# Altium PCB 2019-07-21_03-32-53.PcbDoc
Units mil, origin at the board's own origin, x right, y up, seen from the top; angles counter-clockwise.
Board outline 2206 x 2006 mil, 4 copper layers (Top Layer, MidLayer1, MidLayer2, Bottom Layer); 11 components, 6 nets, 16 pads, 31 vias.
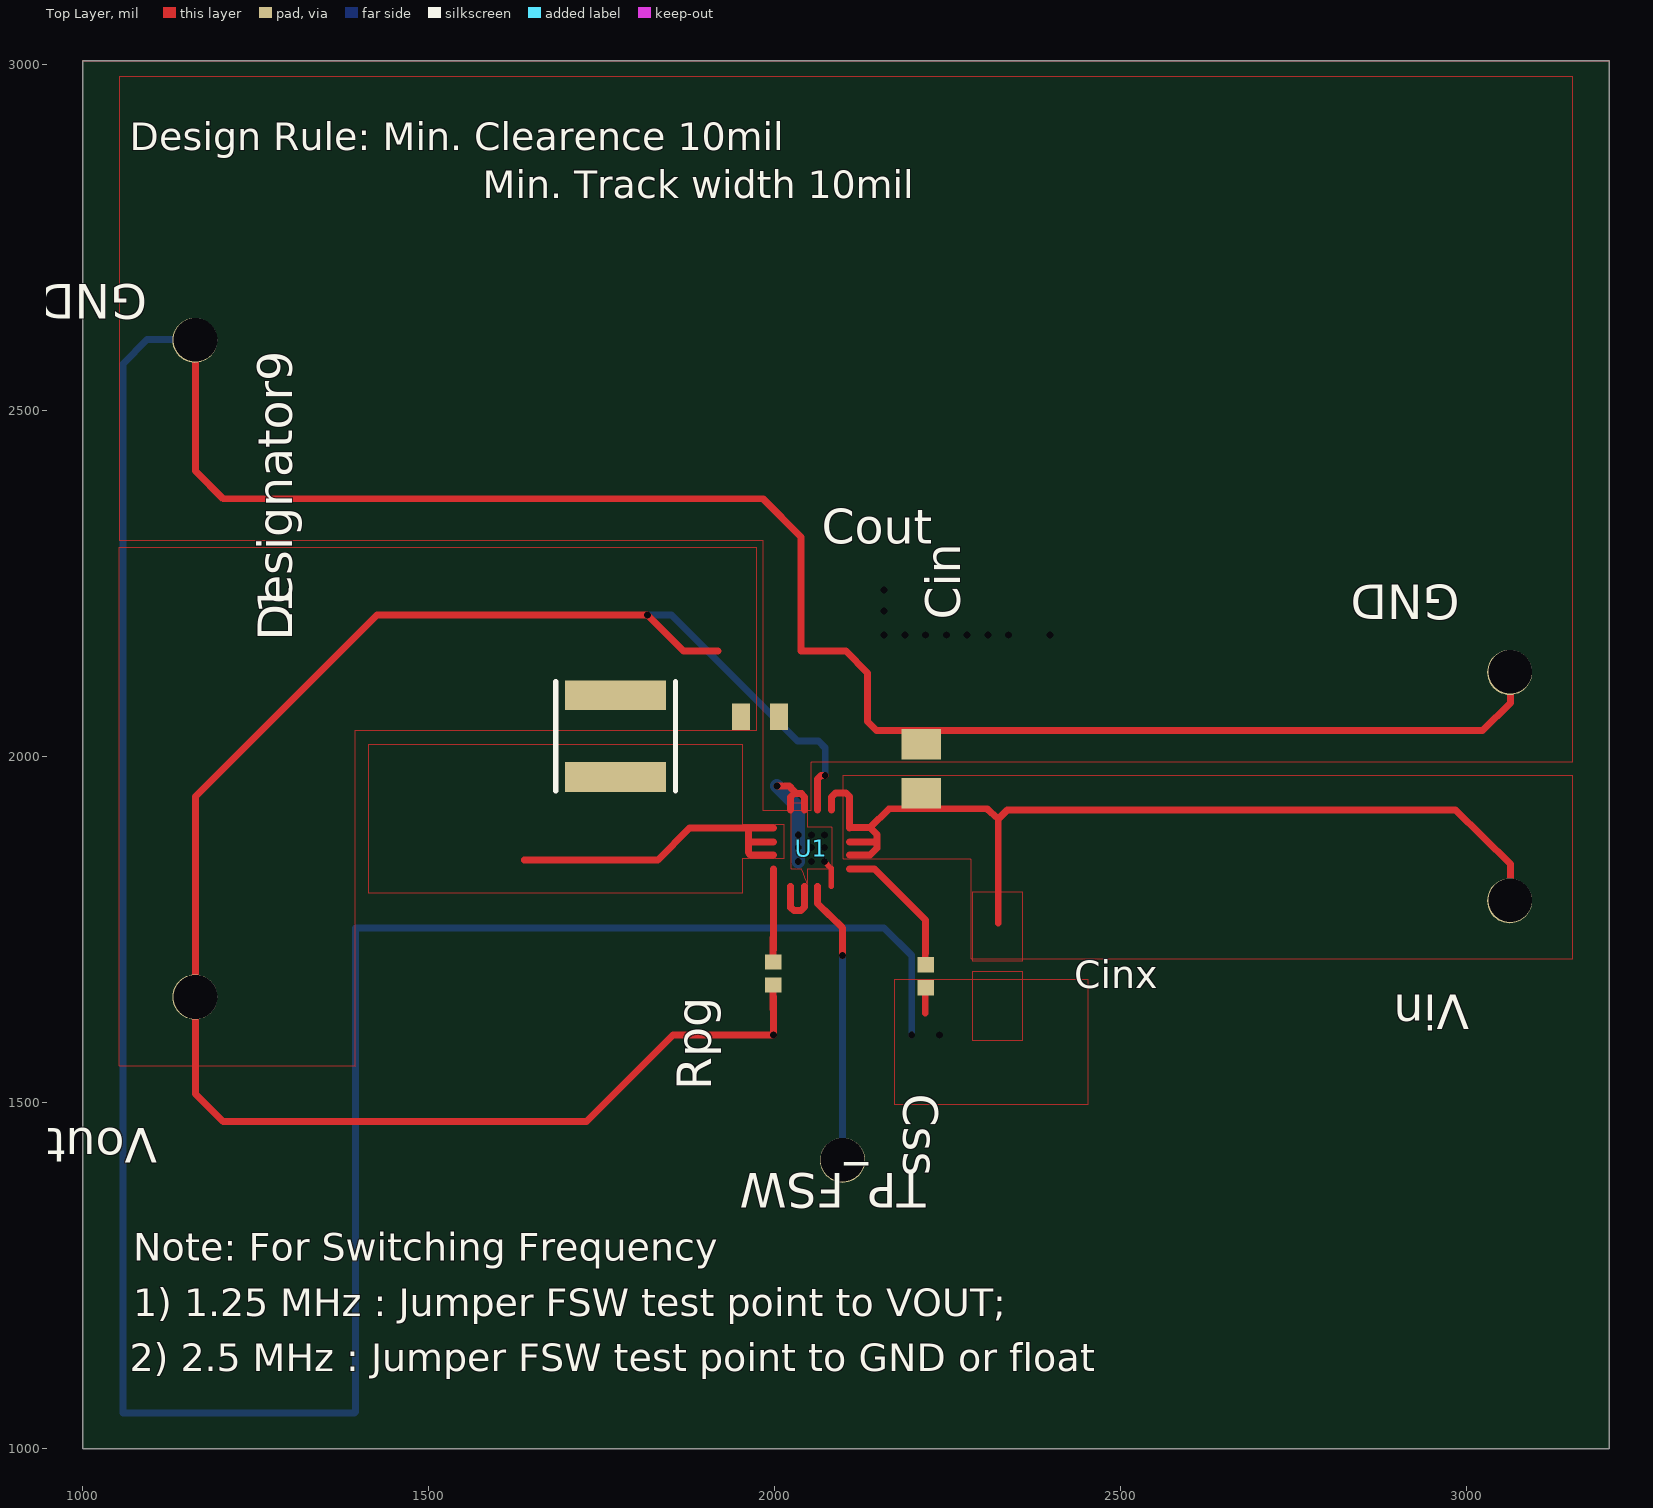
[diagram p0: Top Layer view]
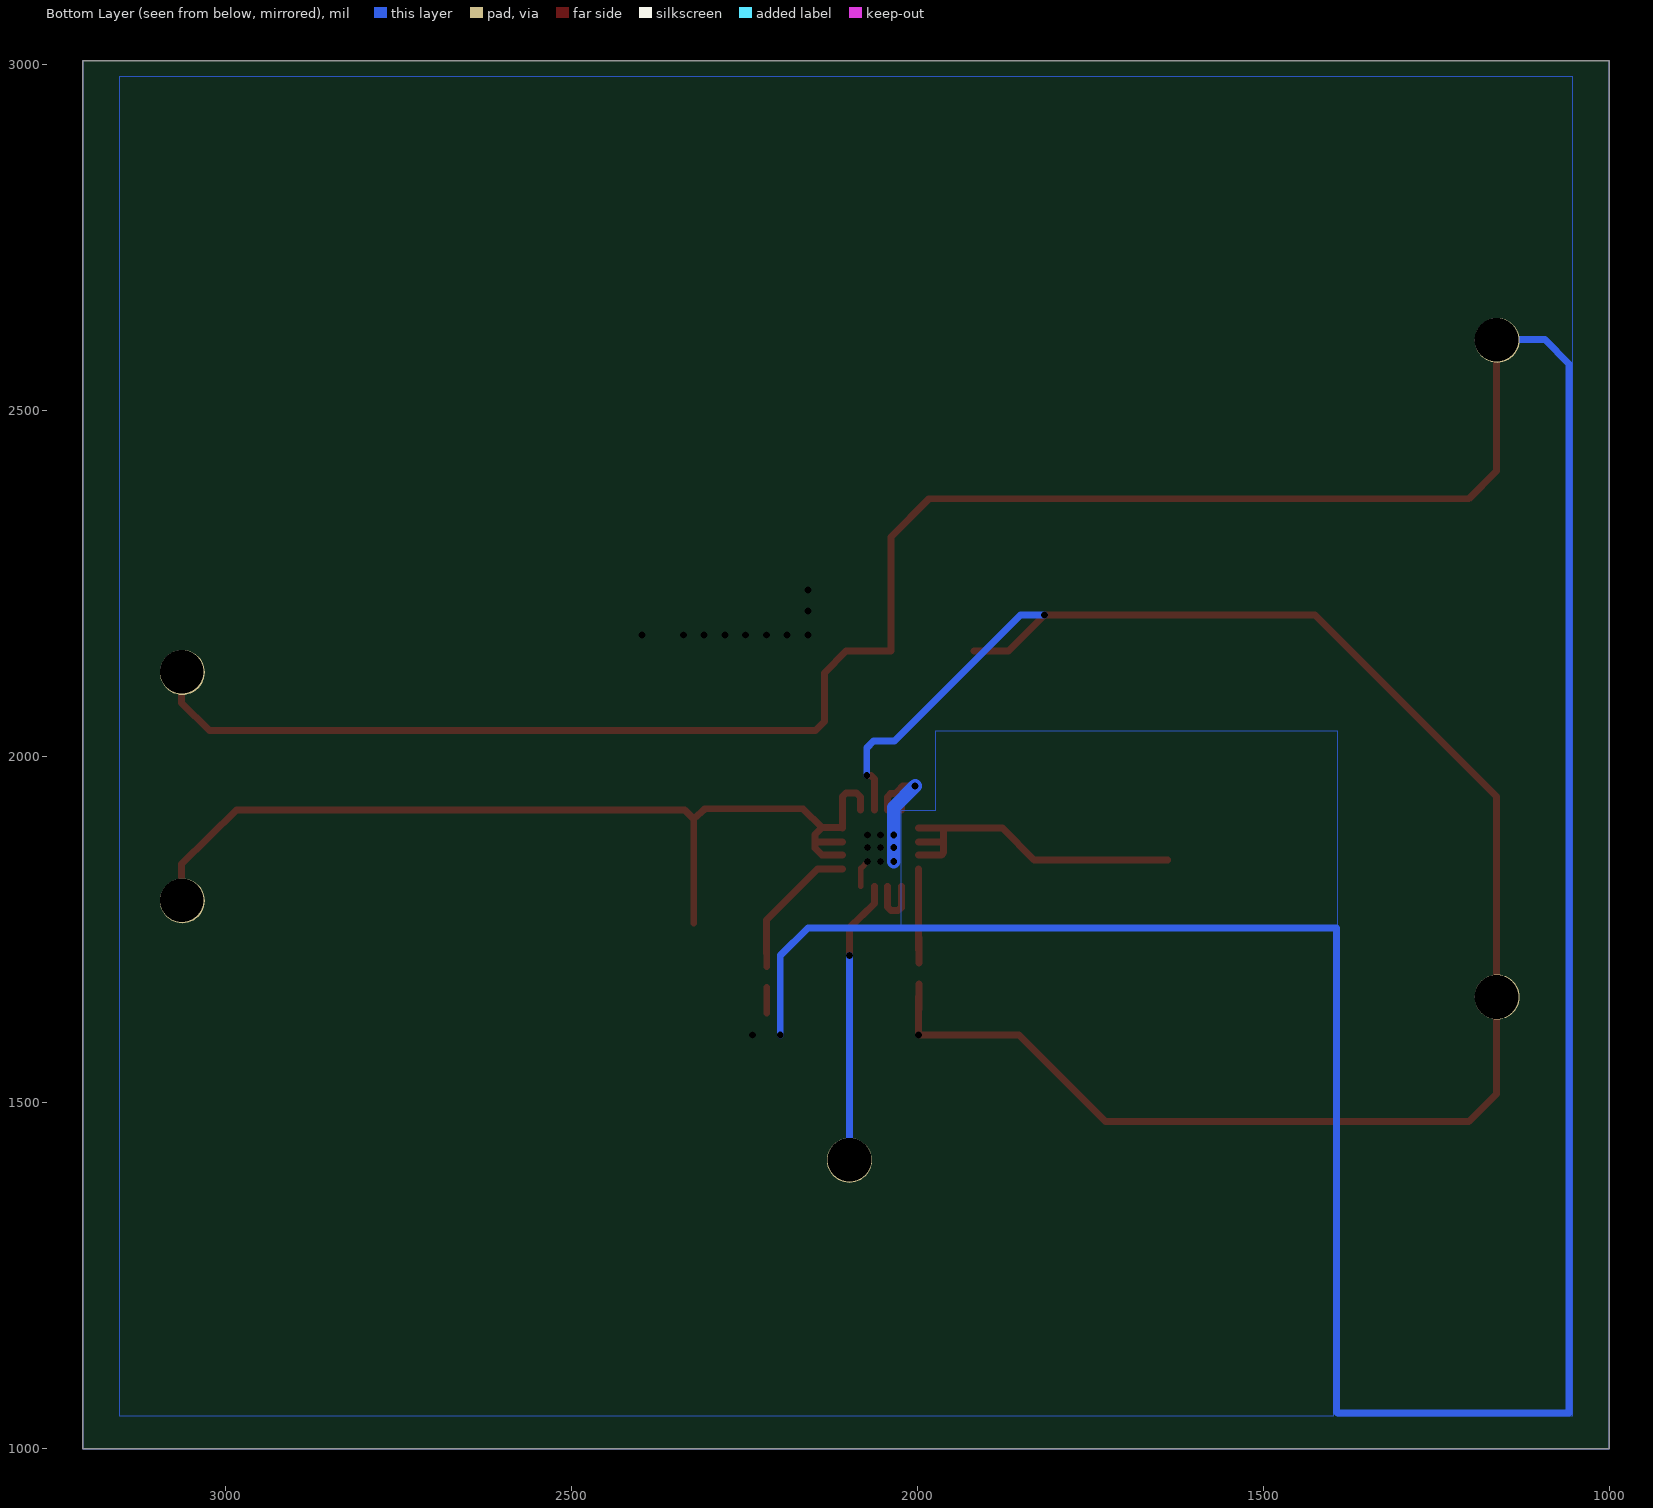
[diagram p1: Bottom Layer view, seen from below]
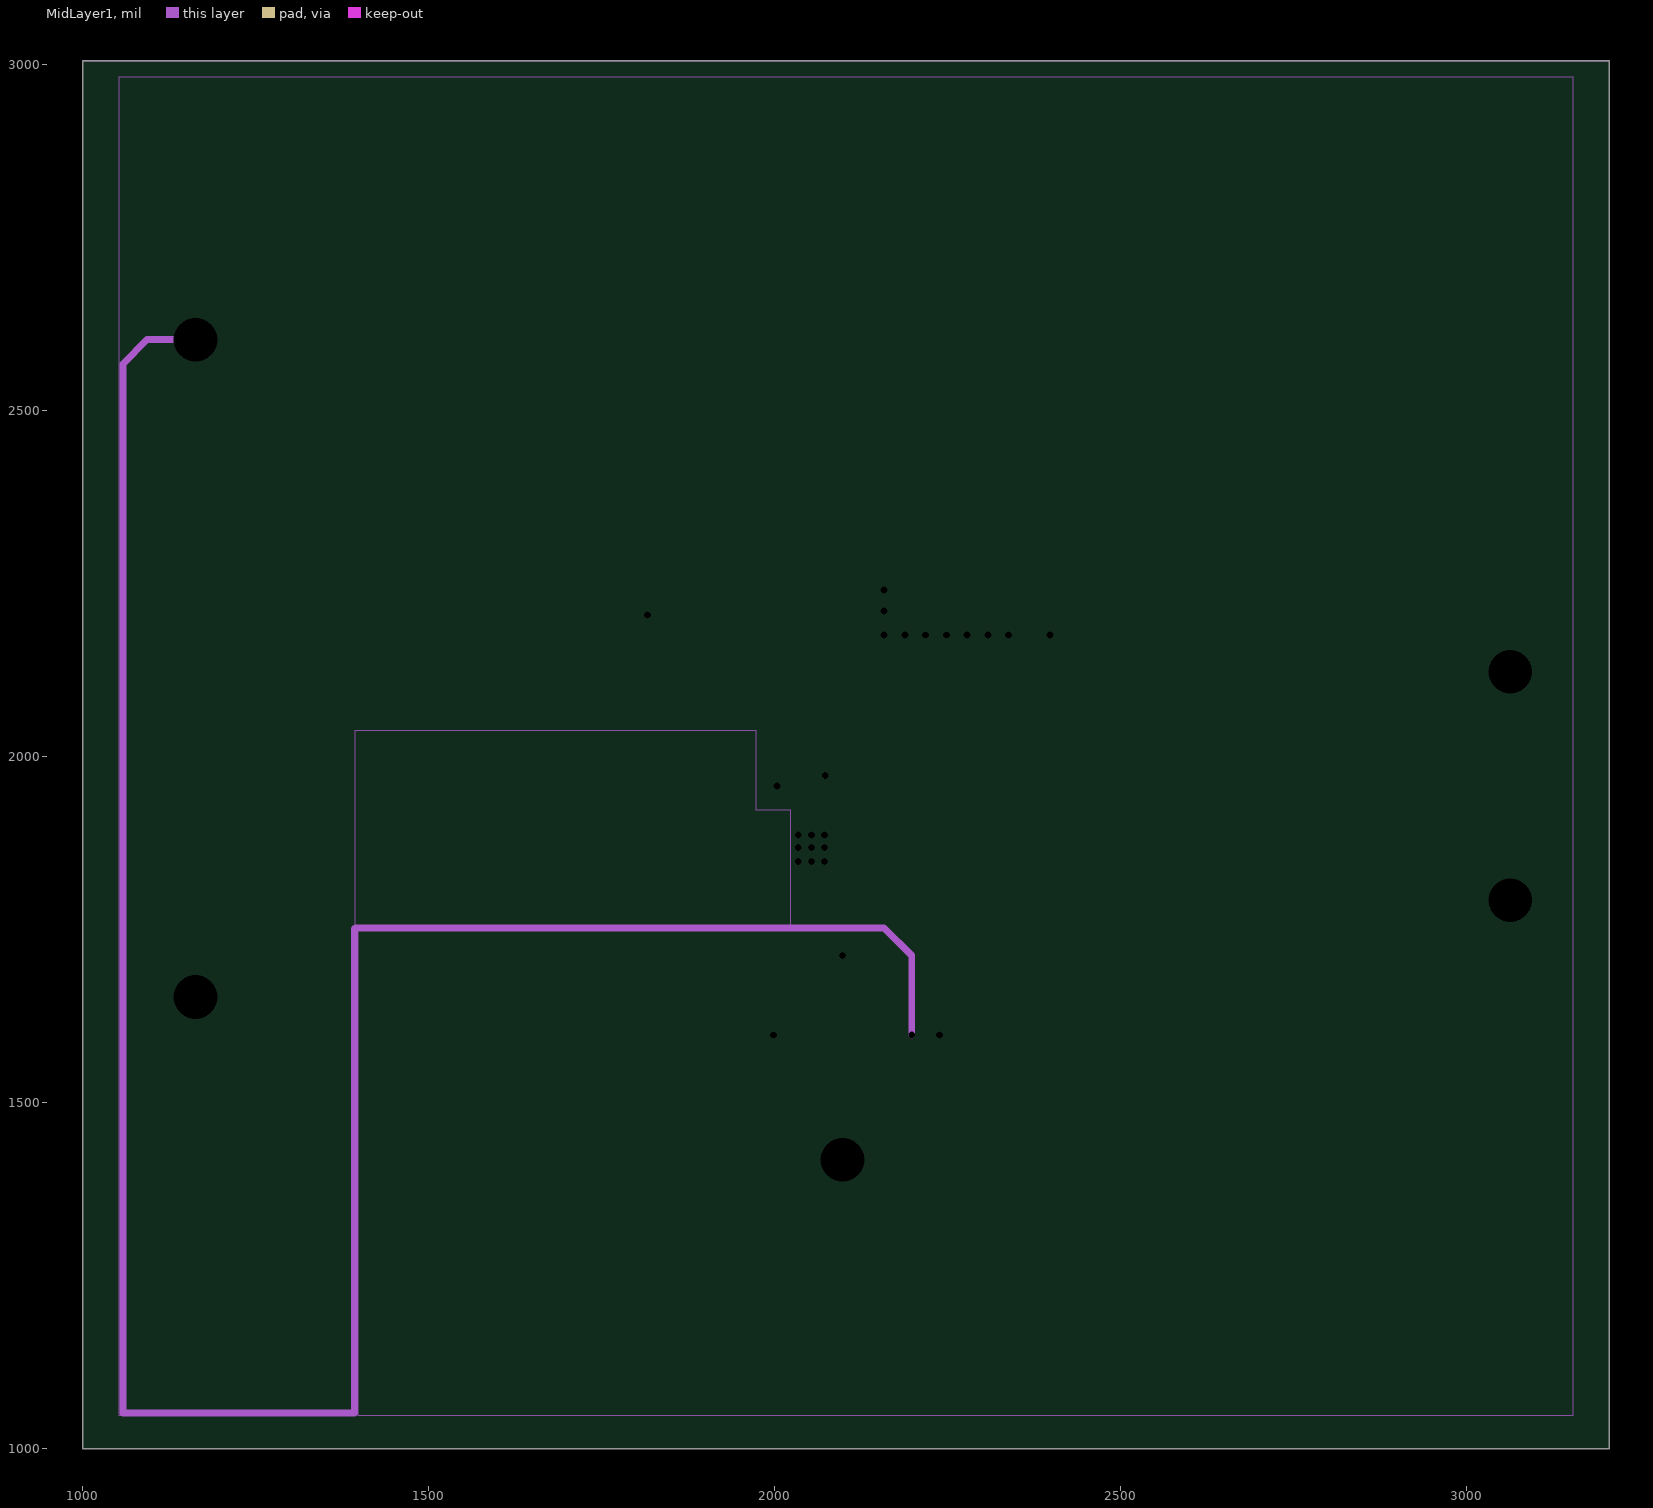
[diagram p2: MidLayer1]
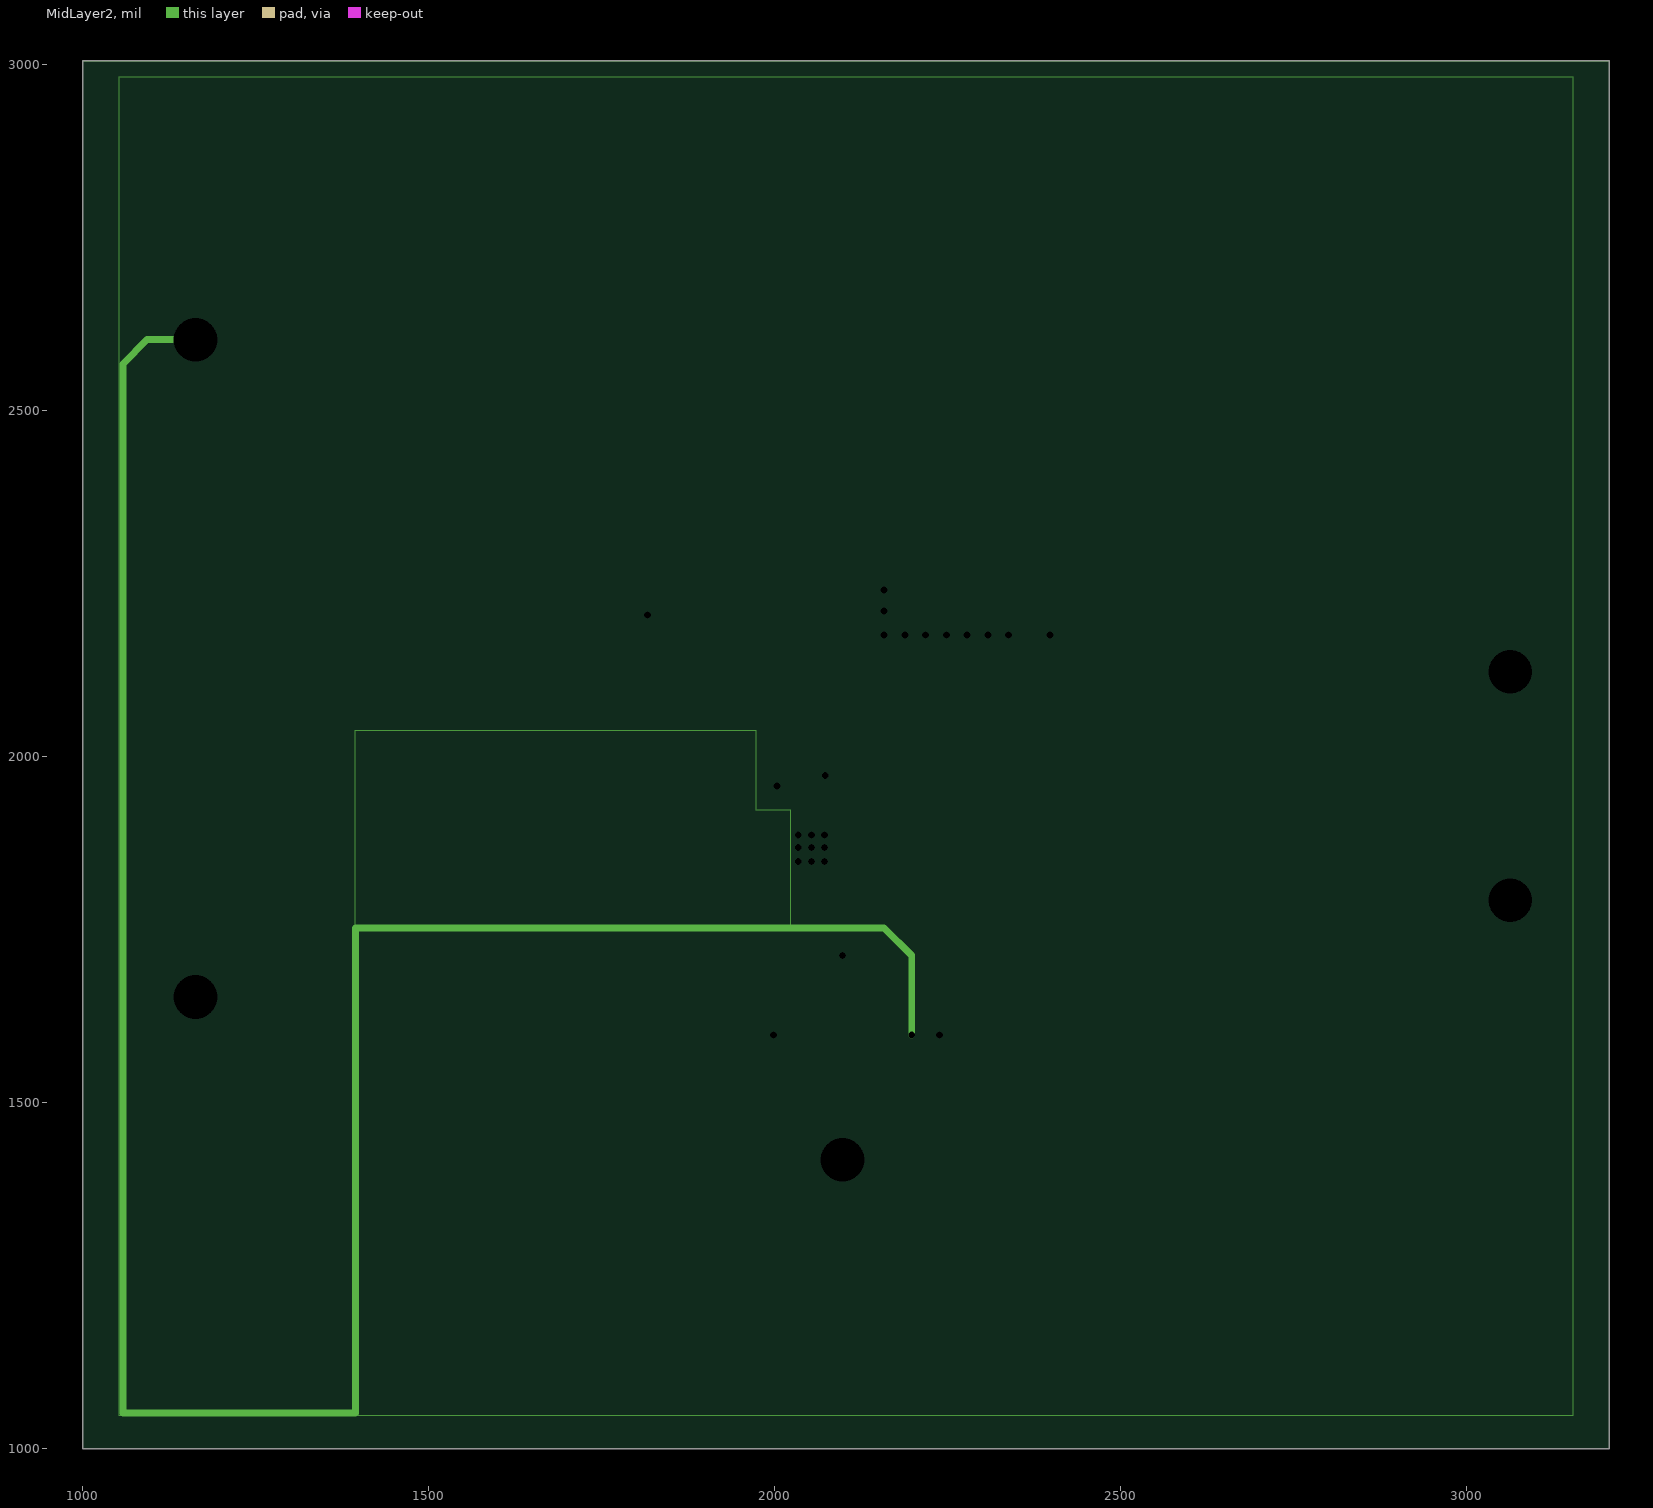
[diagram p3: MidLayer2]

## Layer stack, top to bottom
Top Layer: signal copper 1.4
Dielectric: core 12.6, FR-4, Dk 4.8
MidLayer1: signal copper 1.4
Dielectric: prepreg 12.6, FR-4, Dk 4.8
MidLayer2: signal copper 1.4
Dielectric: core 12.6, FR-4, Dk 4.8
Bottom Layer: signal copper 1.4

## Board outline
1000,1000 3206,1000 3206,3006 1000,3006

## Design rules (kind name [scope] priority, off if disabled: settings)
PlaneConnect [All] p0: scope1count=1 scope1_0_kind=Board scope1_0_value=Board scope2count=1 scope2_0_kind=Board scope2_0_value=Board commentlength=0 planeconnectstyle=Direct reliefexpansion=20 reliefentries=4 reliefconductorwidth=10 reliefairgap=10
PlaneConnect [All] p1: planeconnectstyle=Direct reliefexpansion=20 reliefentries=4 reliefconductorwidth=10 reliefairgap=10
PolygonConnect [All] p0: scope1count=1 scope1_0_kind=Board scope1_0_value=Board scope2count=1 scope2_0_kind=Board scope2_0_value=Board commentlength=0 connectstyle=Direct reliefconductorwidth=10 reliefentries=4 polygonreliefangle="90 Angle"
PolygonConnect [All] p1: connectstyle=Direct reliefconductorwidth=10 reliefentries=4 polygonreliefangle="90 Angle"

## Components (designator, comment, footprint, x,y, rotation, side; value= is the part's Value field where it differs from the comment)
Cin "" 0805 2212,1983 r90 top
Cout "" 0603 1979,2058 r0 top
Css "" 0402 2218,1683 r270 top
GND "" TP-1502#1 3062,2122 r180 top
GND1 "" TP-1502#1 1162,2602 r180 top
L1 "" PA4332 1770,2030 r90 top
Rpg "" 0402 1998,1687 r90 top
TP_FSW "" TP-1502#2 2098,1417 r180 top
U1 "" S-PVQFN-N16 2053,1868 r0 top
Vin "" TP-1502#1 3062,1792 r180 top
Vout "" TP-1502#1 1162,1653 r180 top

## Footprints (in the part's own frame and the unit in brackets; to place one, negate y for a bottom-side part, rotate by r counter-clockwise, add the part's x,y. Pads: shape width x height; smd on the part's side, far side on the other; paste and mask are expansions set on the pad)
0402 [mil]
  rect 22x24 smd: 1(-16.5,0) 2(16.5,0)
0603 [mil]
  rect 26x38 smd: 1(-27.5,0) 2(27.5,0)
0805 [mil]
  rect 44x57 smd: 1(-35.5,0) 2(35.5,0)
PA4332 [mm]
  rect 1.1x3.7 smd: 1(-1.5,0) 2(1.5,0)
  silkscreen extent -2,-2.2 2,2.2
S-PVQFN-N16 [mil]
TP-1502#1 [mil]
  round 65 / inner round 0 / far side round 65 hole 32: 1(0,0)
TP-1502#2 [mil]
  round 65 / inner round 0 / far side round 65 hole 32: 1(0,0) 1(0,0)

## Via types
v1: diameter 0, hole 10, Top Layer to Bottom Layer, 26 vias
v2: diameter 0, hole 63, Top Layer to Bottom Layer, 5 vias

## Nets (pads, with @x,y where several pads share a name; then routed paths per layer and width w, separated by ;. In a path a pad name is that pad's centre, name@x,y a point inside that pad or via, vN(x,y) a via of type N, cw(c..) or ccw(c..) an arc to the next point about the centre after c; other vN are vias at no path point)
0: Cin.2 Cout.2 Css.2 GND1.1 GND.1 | length 13643.6
  Top Layer w8: v1(2072,1849) 2081,1839 ; 2082,1813 2082,1839
  Top Layer w10: v2(1163,2603) 1163,2413 1203,2373 1983,2373 2038,2318 2038,2153 2103,2153 2134,2121 2134,2051 2147,2038 3023,2038 3063,2078 v2(3063,2123) ; v1(2003,1958) 2021,1958 2028,1951 2028,1947 ; 2023,1813 2023,1782 2028,1778 2038,1778 2043,1783 2043,1812 2043,1813 ; 2023,1923 2023,1942 2028,1947 ; 2043,1923 2043,1942 2039,1947 2028,1947 ; 2217.5,1630 Css.2@2217.5,1667
  MidLayer1 w10: v2(1163,2603) 1093,2603 1058,2568 1058,1052 1393,1052 1393,1752 1394,1753 2158,1753 2198,1713 v1(2198,1598)
  MidLayer2 w10: v2(1163,2603) 1093,2603 1058,2568 1058,1052 1394,1052 1394,1753 2158,1753 2198,1713 v1(2198,1598)
  Bottom Layer w10: v2(1163,2603) 1093,2603 1058,2568 1058,1052 1393,1052 ; 1394,1053 1394,1753 2158,1753 2198,1713 v1(2198,1598)
  Bottom Layer w20: v1(2003,1958) 2034,1927 v1(2034,1887) v1(2034,1849)
  other v1: 2238,1598 2053,1849 2034,1869 2053,1869 2072,1869 2053,1887 2072,1887 2158,2176 2188,2176 2218,2176 2248,2176 2278,2176 2308,2176 2338,2176 2398,2176 2158,2211 2158,2241
1: Css.1 | length 225.7
  Top Layer w10: 2108,1838 2144,1838 2218,1764 2218,1716 ; Css.1@2217.5,1697 2217.5,1734
2: Cout.1 L1.2 Rpg.1 TP_FSW.1 Vout.1 | length 3156.2
  Top Layer w10: 1918,2153 1868,2153 v1(1816,2205) 1638,2205 1425,2205 1163,1943 v2(1163,1653) 1163,1513 1203,1473 1728,1473 1853,1598 v1(1998,1598) 1998,1654 ; 1997.5,1635 Rpg.1@1997.5,1672 ; 2062,1813 2062,1788 2098,1753 v1(2098,1713) ; 2062,1923 2062,1968 2067,1973 v1(2073,1973)
  Bottom Layer w10: v1(1816,2205) 1851,2205 2033,2023 2063,2023 2073,2013 v1(2073,1973) ; v2(2098,1418) v1(2098,1713)
3: Cin.1 Vin.1 | length 1426.4
  Top Layer w10: 2082,1923 2082,1942 2088,1948 2103,1948 2108,1943 2108,1897 2108,1898 2138,1898 ; 2108,1858 2138,1858 2148,1868 2148,1877 ; 2108,1877 2148,1877 ; 2323,1760 2323,1910 ; v2(3063,1793) 3063,1845 2984,1923 2336,1923 2323,1910 ; 2138,1898 2148,1888 2148,1877 ; 2138,1898 2165,1925 2233,1925 2307,1925 2323,1910
4: Rpg.2 | length 154
  Top Layer w10: Rpg.2@1997.5,1702 1997.5,1739 ; 1998,1721 1998,1838
5: L1.1 | length 488.9
  Top Layer w10: 1638,1851 1831,1851 1877,1897 1964,1897 ; 1998,1858 1965,1858 1962,1862 1962,1877 ; 1998,1877 1962,1877 ; 1998,1897 1964,1897 ; 1962,1877 1962,1895 1964,1897

## Polygon pours and split planes (outlines as drawn)
3 on Top Layer " " (solid, pour order 0): 2286,1705 2286,1805 2358,1805 2358,1705
5 on Top Layer " " (solid, pour order 1): 2013,1853 1953,1853 1953,1803 1413,1803 1413,2018 1953,2018 1953,1903 2013,1903
2 on Top Layer " " (solid, pour order 2): 1053,2303 1973,2303 1973,2038 1393,2038 1393,1553 1053,1553
3 on Top Layer " " (solid, pour order 3): 2098,1853 2283,1853 2283,1708 3153,1708 3153,1973 2098,1973
0 on Top Layer " " (solid, pour order 4): 2286,1590 2286,1690 2358,1690 2358,1590
0 on Top Layer " " (solid, pour order 8): 2453,1678 2173,1678 2173,1498 2453,1498
0 on Top Layer " " (solid, pour order 9): 2048,1838 2083,1838 2083,1898 2048,1898 2048,1933 2023,1933 2023,1838 2038,1838 2048,1813
0 on Top Layer " " (solid, pour order 10): 2053,1993 3153,1993 3153,2983 1053,2983 1053,2313 1983,2313 1983,1923 2053,1923 2053,1953
0 on Bottom Layer " " (solid, pour order 6): 1973,1923 1973,2038 1393,2038 1393,1048 1053,1048 1053,2983 3153,2983 3153,1048 1398,1048 1398,1753 2023,1753 2023,1923
0 on MidLayer1 " " (solid, pour order 5): 1973,1923 1973,2038 1393,2038 1393,1048 1053,1048 1053,2983 3153,2983 3153,1048 1398,1048 1398,1753 2023,1753 2023,1923
0 on MidLayer2 " " (solid, pour order 7): 1973,1923 1973,2038 1393,2038 1393,1048 1053,1048 1053,2983 3153,2983 3153,1048 1398,1048 1398,1753 2023,1753 2023,1923

## Other copper
Multi-Layer:
  the board outline again, w1

## Silkscreen, mask and mechanical layers (free items; w line width, h text height)
Top Overlay:
  text "Design Rule: Min. Clearence 10mil" at 1068,2877 h40
  text "Min. Track width 10mil" at 1578,2807 h40
  text "Cinx" at 2433,1666 h40
  text "Note: For Switching Frequency" at 1073,1272 h40
  text "1) 1.25 MHz : Jumper FSW test point to VOUT;" at 1073,1192 h40
  text "2) 2.5 MHz : Jumper FSW test point to GND or float" at 1068,1112 h40

## Text inside footprints (layer, text, board x,y; h text height)
L1: Top Overlay "Designator9" at 1303,2168 h50 r90